# Altium PCB pcb_sst.PcbDoc
Units mm, origin at the board's own origin, x right, y up, seen from the top; angles counter-clockwise.
Board outline 129 x 99 mm, 2 copper layers (Top Layer, Bottom Layer); 47 components, 39 nets, 191 pads, 25 vias.
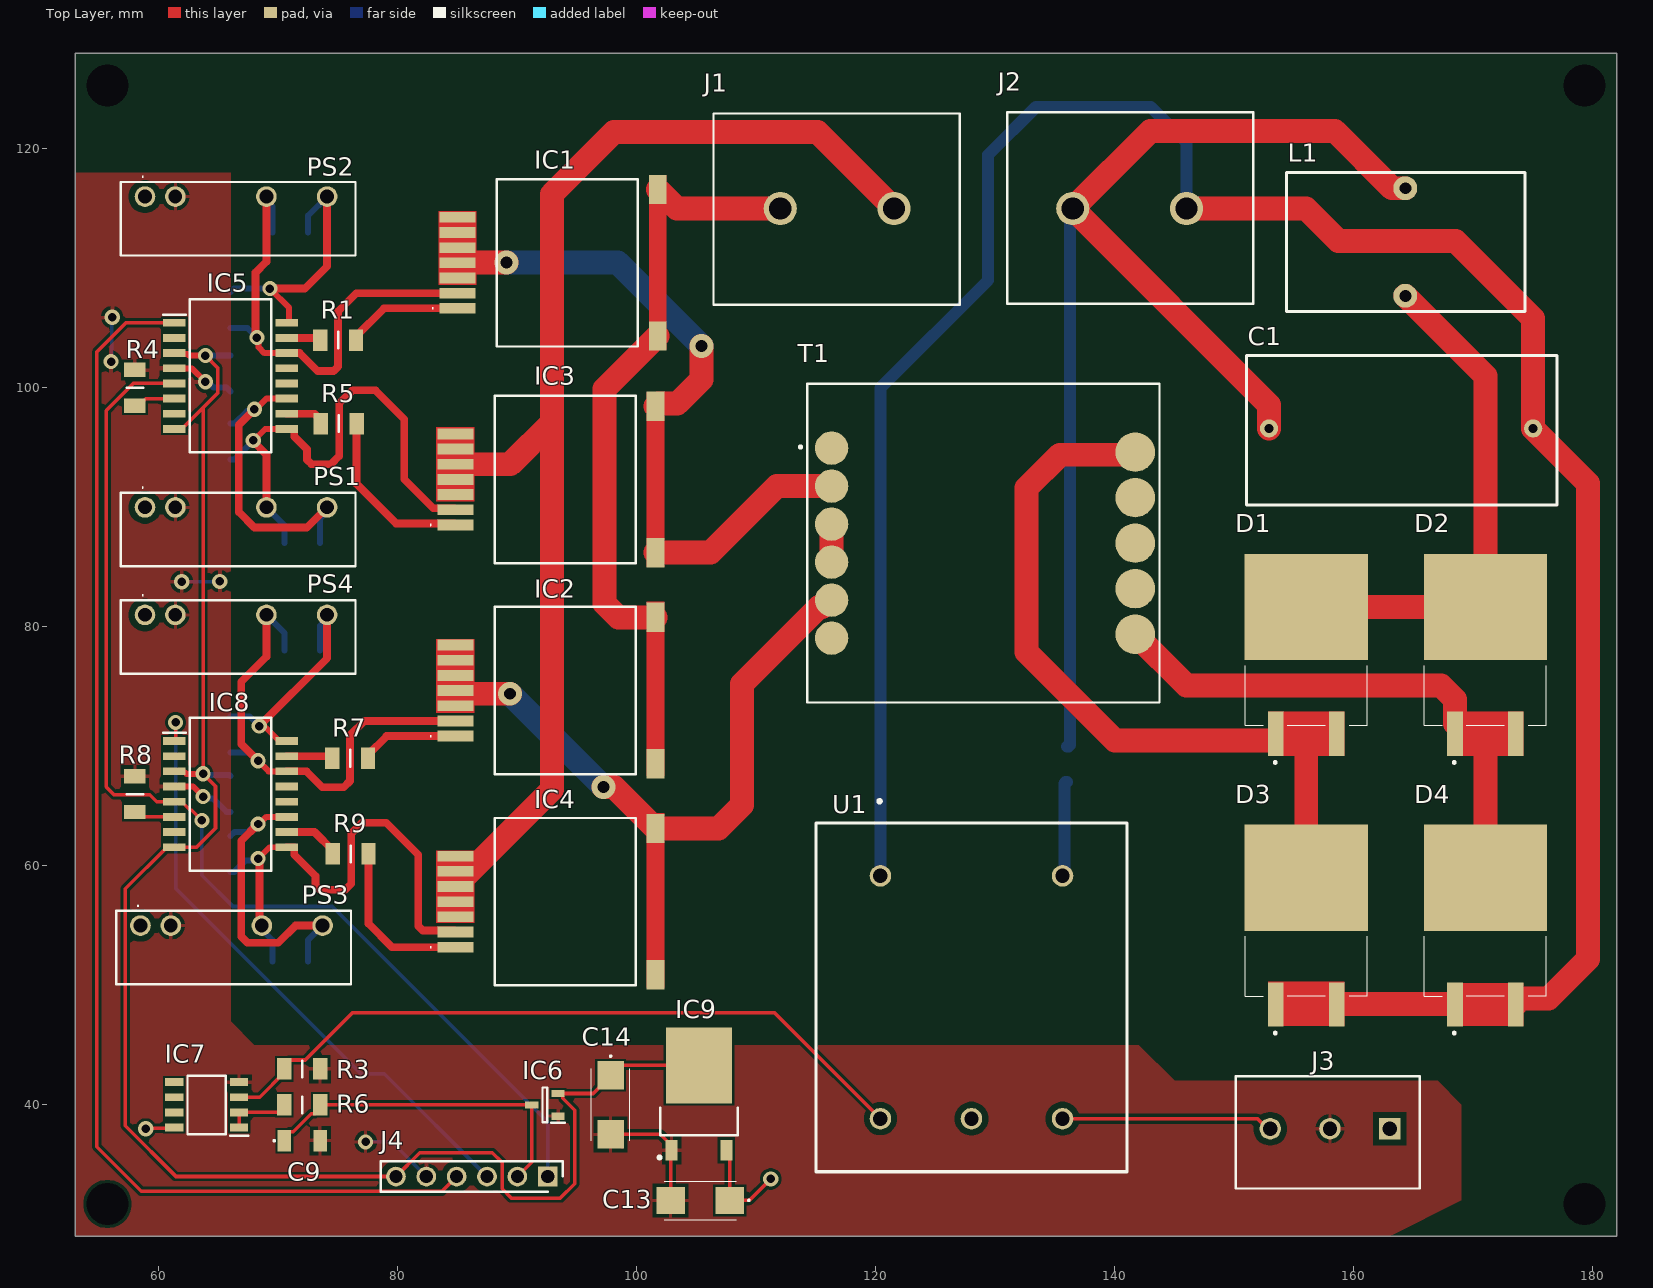
[diagram p0: Top Layer view]
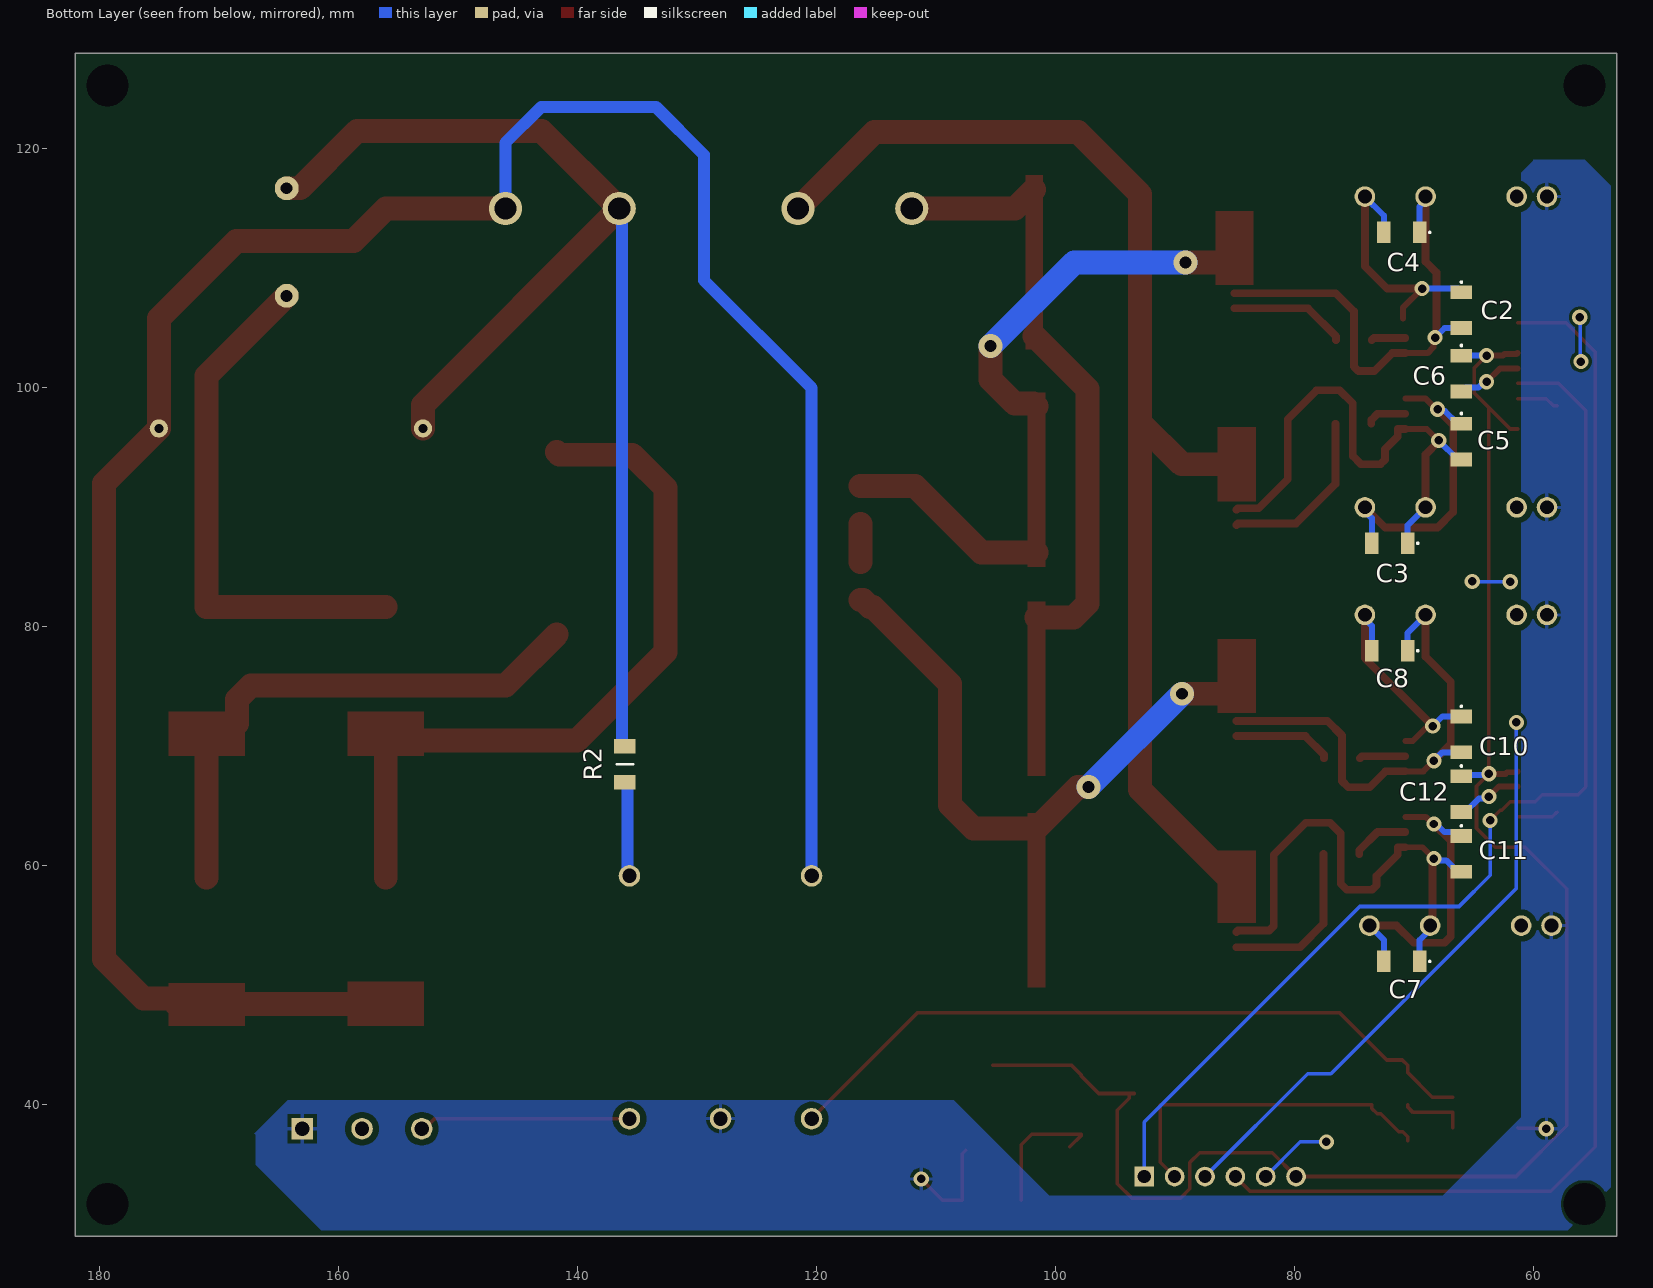
[diagram p1: Bottom Layer view, seen from below]
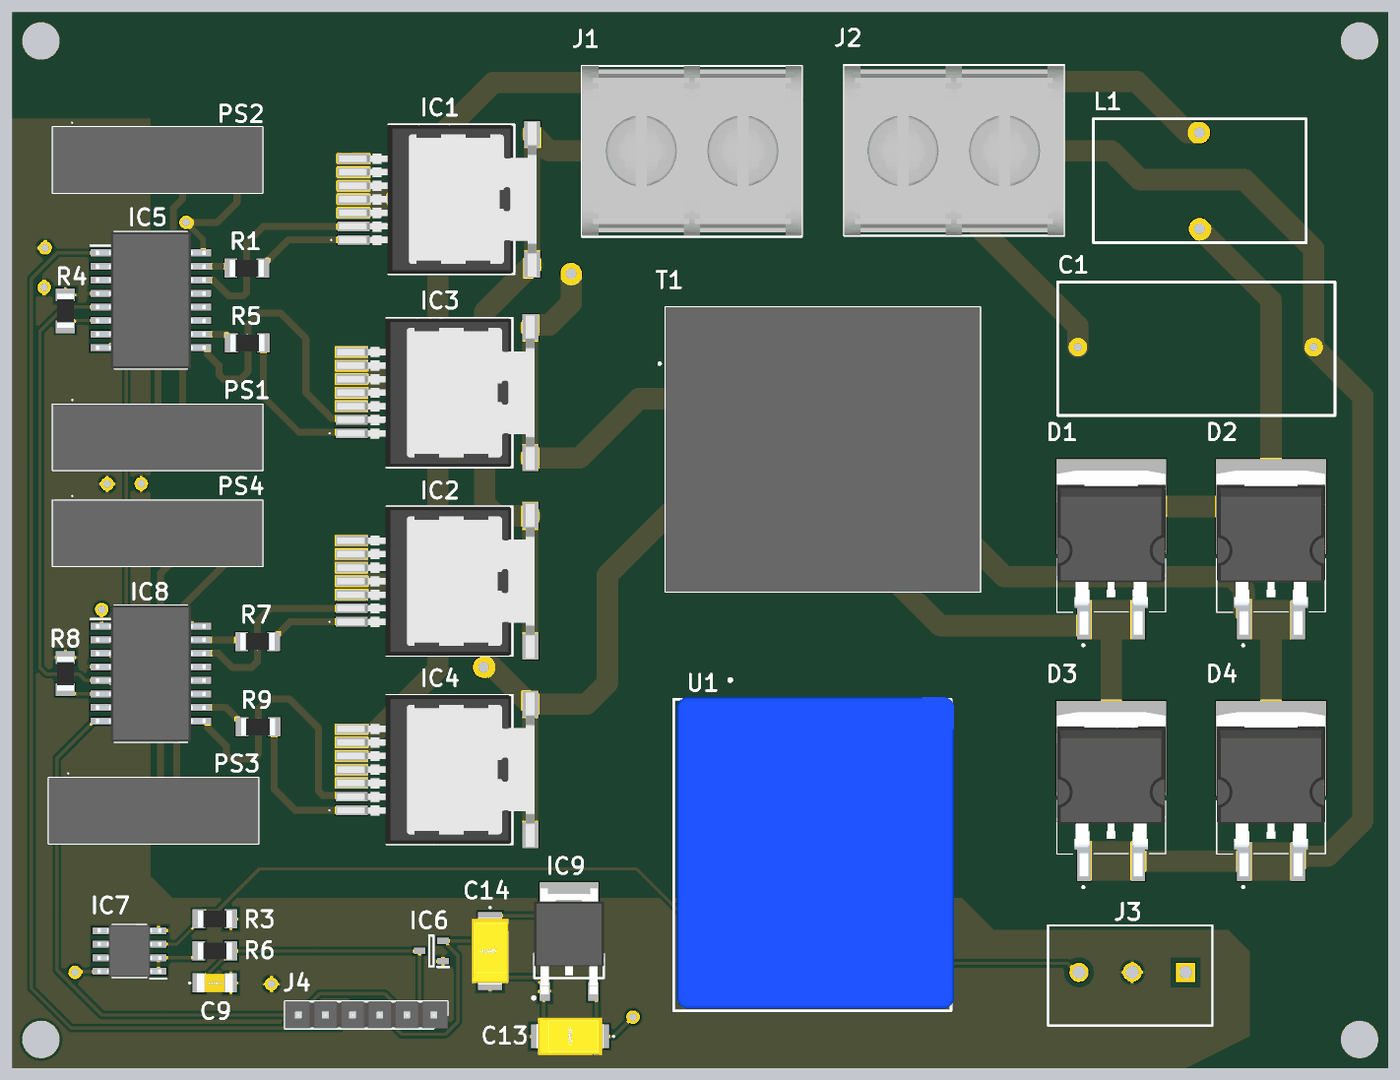
[diagram p2: 3D render of the assembled board from above, using the file's embedded part models]
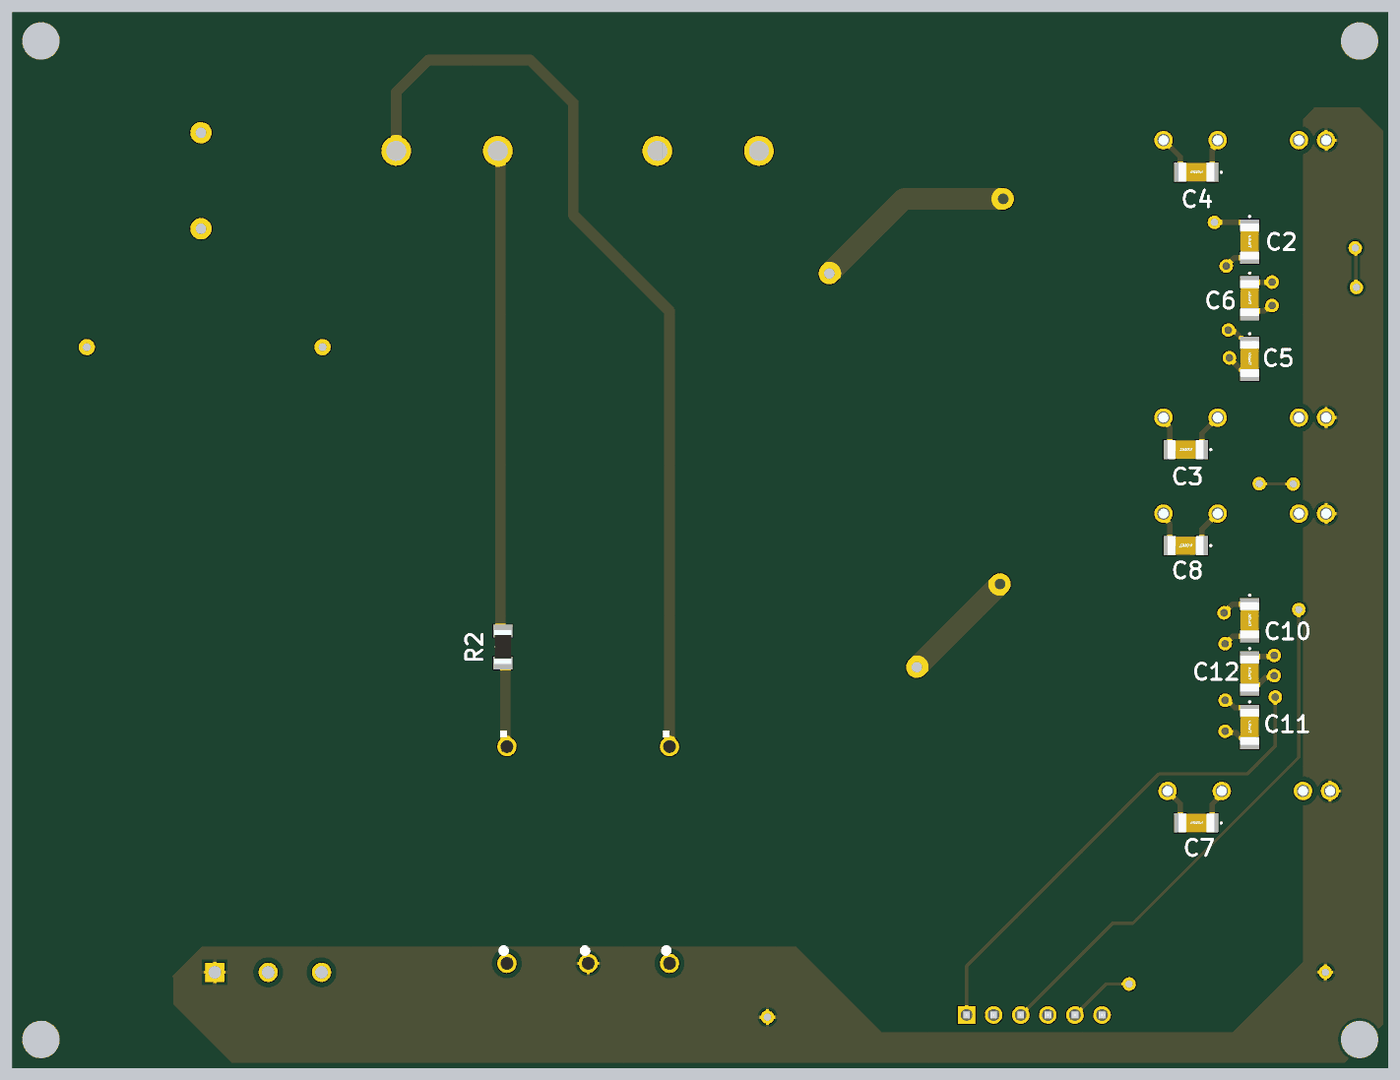
[diagram p3: 3D render of the assembled board from below, using the file's embedded part models]

## Layer stack, top to bottom
Top Solder: solder mask 0.0102, Solder Resist, Dk 3.5
Top Layer: signal copper 0.0356
Dielectric 1: dielectric 0.32, FR-4, Dk 4.8
Bottom Layer: signal copper 0.0356
Bottom Solder: solder mask 0.0102, Solder Resist, Dk 3.5

## Board outline
53,128 53,29 182,29 182,128

## Design rules (kind name [scope] priority, off if disabled: settings)
Clearance Clearance_1 [OnMid vs OnMid] p1: gap=0.254 ignorepadtopadclearanceinfootprint=FALSE except(0.127: Arc-Arc Arc-Track Arc-Text Track-Track Track-Text SMDPad-SMDPad Text-Text; 0.2: Arc-SMDPad Track-SMDPad SMDPad-THPad SMDPad-Fill SMDPad-Poly SMDPad-Region SMDPad-Text; 0.5: THPad-THPad THPad-Fill THPad-Poly THPad-Region Fill-Fill Fill-Poly Fill-Region Poly-Poly Poly-Region Region-Region; 0.8: Hole-Hole) sourcerule=36 cellrowname=All cellrowtype=0 cellcolname=All cellcoltype=0 innerlayers=TRUE
Clearance Clearance_2 [(ExistsOnLayer('Top Layer') Or ExistsOnLayer('Bottom Layer')) vs (ExistsOnLayer('Top Layer') Or ExistsOnLayer('Bottom Layer'))] p2: gap=0.254 ignorepadtopadclearanceinfootprint=FALSE except(0.127: Arc-Arc Arc-Track Arc-Text Track-Track Track-Text SMDPad-SMDPad Text-Text; 0.2: Arc-SMDPad Track-SMDPad SMDPad-THPad SMDPad-Fill SMDPad-Poly SMDPad-Region SMDPad-Text; 0.5: THPad-THPad THPad-Fill THPad-Poly THPad-Region Fill-Fill Fill-Poly Fill-Region Poly-Poly Poly-Region Region-Region; 0.8: Hole-Hole) sourcerule=36 cellrowname=All cellrowtype=0 cellcolname=All cellcoltype=0 outerlayers=TRUE
Clearance [All] p3: gap=0.254 ignorepadtopadclearanceinfootprint=FALSE ismatrix=TRUE
HoleSize [All] p1: absolutevalues=TRUE maxlimit=3.5 minlimit=0.025 maxpercent=80.000 minpercent=20.000
MinimumSolderMaskSliver [All] p1: minsoldermaskwidth=0.16
PolygonConnect [All] p1: connectstyle=Relief reliefconductorwidth=0.3 reliefentries=4 polygonreliefangle="90 Angle" airgapwidth=0.3
RoutingVias [All] p1: holewidth=1 width=2 viastyle="Through Hole" minholewidth=1 minwidth=2 maxholewidth=1 maxwidth=2
SilkToSolderMaskClearance [IsPad] p1: minsilkscreentomaskgap=0.12 clearancetoexposedcopper=TRUE
SolderMaskExpansion [All] p1: expansion=0.102 istentingtop=FALSE
Width [All] p1: maxlimit=2.5 minlimit=0.3 preferedwidth=0.3 minimp=50.000000 maximp=50.000000 favimp=50.000000
27 further rules are at their usual default settings.

## Components (designator, comment, footprint, x,y, rotation, side; value= is the part's Value field where it differs from the comment)
C1 "EEE-FK0J103SM" r60_mkt_10_100_capacitor_10uF 152.9,96.6 r0 top
C2 "1pF" C1206 66,106.5 r270 bottom
C3 "1uF" C1206 72,87 r0 bottom
C4 "1uF" C1206 71,113 r0 bottom
C5 "1pF" C1206 66,95.5 r270 bottom
C6 "100nF" C1206 66,101.19 r270 bottom
C7 "1uF" C1206 71,52 r0 bottom
C8 "1uF" C1206 72,78 r0 bottom
C9 "100nF" C1206 72,37 r0 top
C10 "1pF" C1206 66,71 r270 bottom
C11 "1pF" C1206 66,61 r270 bottom
C12 "100nF" C1206 66,66 r270 bottom
C13 "10uF" T491C 105.3,32 r180 top
C14 "10uF" T491C 97.8,40 r270 top
D1 "STPS41L30CG-TR" STPS41L30CGTR 156.014,76.357 r0 top
D2 "STPS41L30CG-TR" STPS41L30CGTR 171,76.357 r0 top
D3 "STPS41L30CG-TR" STPS41L30CGTR 156.014,53.7 r0 top
D4 "STPS41L30CG-TR" STPS41L30CGTR 171,53.7 r0 top
IC1 "SCT055HU65G3AG" SCT055HU65G3AG 94.18,110.46 r270 top
IC2 "SCT055HU65G3AG" SCT055HU65G3AG 94,74.667 r270 top
IC3 "SCT055HU65G3AG" SCT055HU65G3AG 94,92.333 r270 top
IC4 "SCT055HU65G3AG" SCT055HU65G3AG 94,57 r270 top
IC5 "ADUM4221-1ARIZ" SOIC127P1030X264-16N 66,101 r0 top
IC6 "bat54s" BAT54S 92.3,40 r180 top
IC7 "TSX712IDT" SO-8 64,40 r180 top
IC8 "ADUM4221-1ARIZ" SOIC127P1030X264-16N 66,66 r0 top
IC9 "LM1117IDT-3.3" TO228P991X238-3N 105.2,40.9 r90 top
J1 "NC6-P108-02" NC6P10802 112,115 r0 top
J2 "NC6-P108-02" NC6P10802 146,115 r180 top
J3 "Conector 1x3P" "Conector 1x3 Screw" 163,38 r180 top
J4 "M20-9990646" HDRV6W64P0X254_1X6_1524X254X864P 92.54,34 r180 top
L1 "Inductor" bobine_handmade_20mm_diam 164.3,112.2 r180 top value=1u
PS1 "MEV1S1515SC" MEV1S1515SC 58.84,90 r0 top
PS2 "MEV1S1515SC" MEV1S1515SC 58.84,116 r0 top
PS3 "MEV1S1515SC" MEV1S1515SC 58.46,55 r0 top
PS4 "MEV1S1515SC" MEV1S1515SC 58.84,81 r0 top
R1 "10" RESC3216X75N 75,104 r0 top
R2 "5k" RESC3216X75N 136,68.5 r270 bottom
R3 "120" RESC3216X75N 72,43 r0 top
R4 "10k" RESC3216X75N 58,100 r270 top
R5 "10" RESC3216X75N 75.05,97 r0 top
R6 "10k" RESC3216X75N 72,40 r0 top
R7 "1k" RESC3216X75N 76,69 r0 top
R8 "10k" RESC3216X75N 58,66 r270 top
R9 "1k" RESC3216X75N 76.05,61 r0 top
T1 "PL300-100L" PL300100L 129,87 r0 top
U1 "LV25P" LV-25-P/LV-20-P 128,49 r270 top

## Footprints (in the part's own frame and the unit in brackets; to place one, negate y for a bottom-side part, rotate by r counter-clockwise, add the part's x,y. Pads: shape width x height; smd on the part's side, far side on the other; paste and mask are expansions set on the pad)
BAT54S [mm]
  rect 1.1x0.6 smd: 1(-1.1,0.95) 2(-1.1,-0.95) 3(1.1,0)
  silkscreen extent -1.65,-1.45 0.2,1.5
bobine_handmade_20mm_diam [mm]
  round 2 hole 1: 1(0,4.5) 2(0,-4.5)
  silkscreen extent -10,-5.8 9.95,5.8
C1206 [mm]
  rect 1.15x1.8 smd: 1(-1.5,0) 2(1.5,0)
  silkscreen extent -2.4,-0.05 -2.3,0.05, body extent -1.7,-0.9 1.7,0.9, height 1.1
"Conector 1x3 Screw" [mm]
  rect 1.8x1.8 hole 1.2: 1(0,0)
  round 1.8 hole 1.2: 2(5,0) 3(10,0)
  silkscreen extent -2.5,-4.4 12.9,5
HDRV6W64P0X254_1X6_1524X254X864P [mm]
  rect 1.65x1.65 hole 1.1: 1(0,0)
  round 1.65 hole 1.1: 2(2.54,0) 3(5.08,0) 4(7.62,0) 5(10.16,0) 6(12.7,0)
  silkscreen extent -1.27,-1.27 13.97,1.27, body extent -1.27,-1.27 13.97,1.27, height 8.64
LV-25-P/LV-20-P [mm]
  round 1.8 hole 1.2: 1(-10.16,-7.62) 2(10.16,-7.62) 3(10.16,0) 4(10.16,7.62) 5(-10.16,7.62)
  silkscreen extent -16.54,-13 14.6,13, body extent -14.8,-12.7 14.4,13.3, height 16.4
MEV1S1515SC [mm]
  round 1.725 hole 1.15: 1(0,0) 2(2.54,0) 5(10.16,0) 7(15.24,0)
  silkscreen extent -2.03,-4.92 17.62,1.7, body extent -2.03,-4.92 17.62,1.22, height 10.25
NC6P10802 [mm]
  round 2.781 hole 1.854: 1(0,0) 2(9.525,0)
  silkscreen extent -5.59,-8.05 15.01,7.95, body extent -5.58,-7.94 15.02,7.94, height 16.2
PL300100L [mm]
  round 2.79 smd: 1(-12.7,7.95) 2(-12.7,4.77) 3(-12.7,1.59) 4(-12.7,-1.59) 5(-12.7,-4.77) 6(-12.7,-7.95)
  round 3.3 smd: 7(12.7,-7.62) 8(12.7,-3.81) 9(12.7,0) 10(12.7,3.81) 11(12.7,7.62)
  silkscreen extent -15.41,-13.33 14.73,13.33, body extent -14.73,-13.33 14.73,13.33, height 10.5
r60_mkt_10_100_capacitor_10uF [mil]
  round 60 hole 30: 1(0,0) 2(870.08,0)
  silkscreen extent -75,-252 949,240
RESC3216X75N [mm]
  rect 1.2x1.8 smd: 1(-1.5,0) 2(1.5,0)
  silkscreen extent 0,-0.7 0,0.7, body extent -1.6,-0.8 1.6,0.8, height 0.75
SCT055HU65G3AG [mm]
  rect 0.9x3 smd: 1(3.81,-9.18) 2(2.54,-9.18) 3(1.27,-9.18) 4(0,-9.18) 5(-1.27,-9.18) 6(-2.54,-9.18) 7(-3.81,-9.18)
  rect 2.45x1.5 smd: 8(-6.125,7.57) 9(6.125,7.57)
  silkscreen extent -7,-11.3 7,5.9, body extent -7.23,-10.54 7.23,7.96, height 3.55
SO-8 [mm]
  rect 1.525x0.65 smd: 1(-2.712,1.905) 2(-2.712,0.635) 3(-2.712,-0.635) 4(-2.712,-1.905) 5(2.712,-1.905) 6(2.712,-0.635) 7(2.712,0.635) 8(2.712,1.905)
  silkscreen extent -3.47,-2.45 1.6,2.58, body extent -3,-2.45 3,2.45, height 1.75
SOIC127P1030X264-16N [mm]
  rect 1.9x0.65 smd: 1(-4.7,4.445) 2(-4.7,3.175) 3(-4.7,1.905) 4(-4.7,0.635) 5(-4.7,-0.635) 6(-4.7,-1.905) 7(-4.7,-3.175) 8(-4.7,-4.445) 9(4.7,-4.445) 10(4.7,-3.175) 11(4.7,-1.905) 12(4.7,-0.635) 13(4.7,0.635) 14(4.7,1.905) 15(4.7,3.175) 16(4.7,4.445)
  silkscreen extent -5.65,-6.4 3.4,6.4, body extent -5.15,-6.4 5.15,6.4, height 2.64
STPS41L30CGTR [mm]
  rect 1.3x3.7 smd: 1(-2.54,-5.3) 3(2.54,-5.3)
  rect 10.3x8.9 smd: 2(0,5.3)
  silkscreen extent -5.1,-7.8 5.1,0.4, body extent -5.1,-6.74 5.1,8.68, height 4.83
T491C [mm]
  rect 2.37x2.23 smd: 1(-2.47,0) 2(2.47,0)
  silkscreen extent -4.12,-1.6 3,1.6, body extent -3.15,-1.75 3.15,1.75, height 2.81
TO228P991X238-3N [mm]
  rect 1.75x1 smd: 1(-4.7,2.285) 3(-4.7,-2.285)
  rect 6.35x5.55 smd: 4(2.4,0)
  silkscreen extent -5.42,-3.25 -1.15,3.42, body extent -4.95,-3.29 4.95,3.29, height 2.47

## Part data
C1: "Capacitor Polarised", Manufacturer_Name=Panasonic, Mouser Part Number=667-EEE-FK0J103SM, Arrow Part Number=EEE-FK0J103SM, Arrow Price/Stock=https://www.arrow.com/en/products/eee-fk0j103sm/panasonic?region=nac, Datasheet Link=http://industrial.panasonic.com/cdbs/www-data/pdf/RDE0000/ABA0000C1247.pdf, Height=17mm, Manufacturer_Part_Number=EEE-FK0J103SM, Mouser Price/Stock=https://www.mouser.co.uk/ProductDetail/Panasonic/EEE-FK0J103SM?qs=BZBei1rCqCBAIuPdads%2FBA%3D%3D
C2 C3 C4 C5 C6 C7 C8 C9 C10 C11 C12: library part Capacitor
C13: library part Capacitor, "tantalum"
C14: library part Capacitor, "Tantalum"
D1 D2 D3 D4: "Schottky Diode", Manufacturer_Name=STMicroelectronics, Mouser Part Number=511-STPS41L30CG-TR, Arrow Part Number=STPS41L30CG-TR, Arrow Price/Stock=https://www.arrow.com/en/products/stps41l30cg-tr/stmicroelectronics?region=nac, Datasheet Link=https://componentsearchengine.com/Datasheets/2/STPS41L30CG-TR.pdf, Height=4.6mm, Manufacturer_Part_Number=STPS41L30CG-TR, Mouser Price/Stock=https://www.mouser.co.uk/ProductDetail/STMicroelectronics/STPS41L30CG-TR?qs=jc1eLQFRxDHV9yBTVSfaIA%3D%3D
IC1 IC2 IC3 IC4: "Integrated Circuit", Manufacturer_Name=STMicroelectronics, Mouser Part Number=511-SCT055HU65G3AG, Datasheet Link=https://www.st.com/resource/en/datasheet/sct055hu65g3ag.pdf, Manufacturer_Part_Number=SCT055HU65G3AG, Mouser Price/Stock=https://www.mouser.co.uk/ProductDetail/STMicroelectronics/SCT055HU65G3AG?qs=amGC7iS6iy%252BmvA31UWzWZg%3D%3D
IC5 IC8: "Integrated Circuit", Manufacturer_Name="Analog Devices", Mouser Part Number=584-ADUM4221-1ARIZ, Arrow Part Number=ADUM4221-1ARIZ, Arrow Price/Stock=https://www.arrow.com/en/products/adum4221-1ariz/analog-devices?region=nac, Datasheet Link=https://www.mouser.com/datasheet/2/609/adum4221_adum4221_1-1901725.pdf, Height=2.64mm, Manufacturer_Part_Number=ADUM4221-1ARIZ, Mouser Price/Stock=https://www.mouser.co.uk/ProductDetail/Analog-Devices/ADUM4221-1ARIZ?qs=DPoM0jnrROU7HCm%2F%252BdCvpQ%3D%3D
IC9: "Integrated Circuit", Manufacturer_Name="Texas Instruments", Mouser Part Number=926-LM1117IDT-33, Datasheet Link=https://datasheet.datasheetarchive.com/originals/distributors/SFDatasheet-3/sf-00077938.pdf, Height=2.38mm, Manufacturer_Part_Number=LM1117IDT-3.3, Mouser Price/Stock=https://www.mouser.co.uk/ProductDetail/Texas-Instruments/LM1117IDT-33?qs=X1J7HmVL2ZH2wA5IJrsANw%3D%3D
J1 J2: "Connector", Manufacturer_Name="TE Connectivity", Mouser Part Number=571-314376640, Arrow Part Number=NC6-P108-02, Arrow Price/Stock=https://www.arrow.com/en/products/nc6-p108-02/te-connectivity?region=nac, Datasheet Link=https://www.te.com/commerce/DocumentDelivery/DDEController?Action=srchrtrv&DocNm=1-1773458-2_BARRIER_STRIPS_QRG&DocType=Data%20Sheet&DocLang=English&PartCntxt=3-1437664-0&DocFormat=pdf, Height=16.764mm, Manufacturer_Part_Number=NC6-P108-02, Mouser Price/Stock=https://www.mouser.co.uk/ProductDetail/TE-Connectivity/NC6-P108-02?qs=eaV0Ah4wSgl6VCGwzfbTcQ%3D%3D
J4: "Connector", Manufacturer_Name=Harwin, Mouser Part Number=855-M20-9990646, Datasheet Link=https://cdn.harwin.com/pdfs/M20-999.pdf, Height=8.64mm, Manufacturer_Part_Number=M20-9990646, Mouser Price/Stock=https://www.mouser.co.uk/ProductDetail/Harwin/M20-9990646?qs=Jph8NoUxIfXDcWZbabSSiw%3D%3D
PS1 PS2 PS3 PS4: "Power Supply", Manufacturer_Name="Murata Electronics", Mouser Part Number=580-MEV1S1515SC, Arrow Part Number=MEV1S1515SC, Arrow Price/Stock=https://www.arrow.com/en/products/mev1s1515sc/murata-power-solutions?region=nac, Datasheet Link=https://power.murata.com/data/power/ncl/kdc_mev.pdf, Height=10.15mm, Manufacturer_Part_Number=MEV1S1515SC, Mouser Price/Stock=https://www.mouser.co.uk/ProductDetail/Murata-Power-Solutions/MEV1S1515SC?qs=ElE%2F8fqQeYgmd421%2FET8wA%3D%3D
R1 R4 R5 R6 R7 R8 R9: library part Resistor
R2: library part Resistor, "140 mW"
R3: library part Resistor, "82.5 mW"
T1: "Transformer", Manufacturer_Name=COILCRAFT, Mouser Part Number=994-PL300-100L, Datasheet Link=https://componentsearchengine.com/Datasheets/2/PL300-100L.pdf, Height=10.4mm, Manufacturer_Part_Number=PL300-100L, Mouser Price/Stock=https://www.mouser.co.uk/ProductDetail/Coilcraft/PL300-100L?qs=W38ilblRkRl%252BXAXYuhUadw%3D%3D
U1: "Undefined or Miscellaneous", Manufacturer_Name=LEM, Manufacturer_Part_Number=LV25P
L1: SimulationGenericComponent=True

## Free pads (board coordinates)
  round 0 hole 3.5 mask+0: ""(55.7,31.7) ""(55.7,125.3) ""(179.3,31.7) ""(179.3,125.3)

## Via types
v1: diameter 1.27, hole 0.711, Top Layer to Bottom Layer, 21 vias
v2: diameter 2, hole 1, Top Layer to Bottom Layer, 4 vias

## Nets (pads, with @x,y where several pads share a name; then routed paths per layer and width w, separated by ;. In a path a pad name is that pad's centre, name@x,y a point inside that pad or via, vN(x,y) a via of type N, cw(c..) or ccw(c..) an arc to the next point about the centre after c; other vN are vias at no path point)
+3.3V: C6.1 C12.1 C14.1 IC5.3 IC5.8 IC6.2 IC8.3 IC8.8 IC9.4 J4.6 | length 147.6
  Top Layer w0.3: IC5.8 61.925,96.555 63.7,98.33 ; v1(63.9,102.7) 64.939,101.661 64.939,99.569 63.7,98.33 ; IC6.2 IC6.2@93.65,40.95 ; IC9.4 98.63,43.3 C14.1 97.8,42.4 96.35,40.95 IC6.2@93.65,40.95 ; 63.7,98.33 v1(63.7,67.7) 64.739,66.661 64.739,63.139 63.155,61.555 IC8.8 60.675,61.555 57.194,58.074 57.194,38.237 61.431,34 J4.6 81.84,36 87.9,36 88.73,35.17 88.73,32.97 89.5,32.2 93.6,32.2 94.8,33.4 94.8,39.55 93.8,40.55 93.8,40.8 IC6.2@93.65,40.95
  Top Layer w0.5: IC8.3 61.375,67.83 62.185,67.83 62.315,67.7 v1(63.7,67.7) ; IC5.3 61.375,102.83 62.385,102.83 62.515,102.7 v1(63.9,102.7)
  Bottom Layer w0.5: v1(63.7,67.7) 63.8,67.6 65.9,67.6 C12.1 ; v1(63.9,102.7) 63.905,102.695 65.995,102.695 C6.1
+15v: C13.1 IC7.8 IC9.3 J3.1 PS1.1 PS2.1 PS3.1 PS4.1 U1.3 | length 11.3
  Top Layer w0.3: v1(58.9,38) 58.947,38.048 61.24,38.048 IC7.8 ; IC9.3 107.77,35.915 C13.1 109.4,32 v1(111.2,33.8) 111,33.8 v1@110.9,33.9
+15V_P1: C3.2 C5.1 IC5.11 PS1.7 | length 26.6
  Top Layer w0.5: v1(68,98.2) 68.105,98.2 69,99.095 IC5.11
  Top Layer w0.65: v1(68,98.2) 66.686,96.886 66.686,89.614 68,88.3 72.38,88.3 PS1.7
  Bottom Layer w0.5: C5.1 66.325,97 67.378,98.053 67.853,98.053 v1(68,98.2) ; C3.2 73.5,89.089 74.08,89.669 PS1.7
+15V_P2: C2.1 C4.2 IC5.16 PS2.7 | length 21.6
  Top Layer w0.5: v1(69.3,108.3) 70.9,106.7 70.9,105.8
  Top Layer w0.65: v1(69.3,108.3) 72.2,108.3 74.08,110.18 PS2.7
  Bottom Layer w0.5: C2.1 66.3,108.3 v1(69.3,108.3) ; C4.2 72.5,114.42 PS2.7
+15V_P3: C7.2 C11.1 IC8.11 PS3.7 | length 26.5
  Top Layer w0.5: v1(68.3,63.5) 68.405,63.5 69,64.095 IC8.11
  Top Layer w0.65: v1(68.3,63.5) 66.9,62.1 66.9,54.081 67.422,53.558 69.995,53.558 71.437,55 PS3.7
  Bottom Layer w0.5: C11.1 66.325,62.825 67.417,62.825 68.092,63.5 v1(68.3,63.5) ; C7.2 72.5,53.8 PS3.7
+15V_P4: C8.2 C10.1 IC8.16 PS4.7 | length 20.4
  Top Layer w0.5: v1(68.4,71.7) 68.547,71.553 68.967,71.553 70.075,70.445 IC8.16
  Top Layer w0.65: v1(68.4,71.7) 74.08,77.38 PS4.7
  Bottom Layer w0.5: C10.1 67.6,72.5 v1(68.4,71.7) ; C8.2 73.5,80.089 74.08,80.669 PS4.7
-15v: J3.3 U1.4 | length 17.7
  Top Layer w0.3: U1.4 151.931,38.84 152.771,38 J3.3
DIS: IC5.5 IC8.5 J4.1 | length 93.9
  Top Layer w0.3: IC5.5 57.87,100.365 55.6,98.095 55.6,66.6 56.25,65.95 59.25,65.95 59.835,65.365 IC8.5 61.925,65.365 62.637,64.653 62.747,64.653 v1(63.6,63.8)
  Bottom Layer w0.3: v1(63.6,63.8) 63.6,59.2 66.2,56.6 74.5,56.6 92.54,38.56 J4.1
gate_aB: IC3.1 R5.2 | length 14.7
  Top Layer w0.65: R5.2 76.55,91.95 79.852,88.648 84.695,88.648 IC3.1
gate_aT: IC1.1 R1.2 | length 9.8
  Top Layer w0.65: R1.2 76.5,104.3 78.85,106.65 IC1.1
gate_bB: IC4.1 R9.2 | length 13.9
  Top Layer w0.65: R9.2 77.55,55.15 79.51,53.19 IC4.1
gate_bT: IC2.1 R7.2 | length 8.3
  Top Layer w0.65: R7.2 77.5,69.3 79.057,70.857 IC2.1
GND: C6.2 C9.2 C12.2 C13.2 C14.2 IC5.4 IC6.1 IC7.4 IC8.4 IC9.1 J3.2 J4.5 PS1.2 PS2.2 PS3.2 PS4.2 R3.2 R4.1 R8.1 | length 35.9
  Top Layer w0.3: C14.2@98.765,36.495 97.8,37.46 C14.2 101.96,37.53 102.83,36.66 C13.2
  Top Layer w0.5: IC8.4 62.865,66.635 v1(63.7,65.8) ; IC5.4 62.765,101.635 v1(63.9,100.5)
  Bottom Layer w0.3: v1(56,102.2) 56.05,102.25 56.05,105.85 v1(56.1,105.9) ; v1(61.915,83.768) 61.931,83.784 65.084,83.784 v1(65.1,83.8) ; v1(77.3,36.9) 79.48,36.9 J4.5
  Bottom Layer w0.5: v1(63.7,65.8) 63.847,65.653 64.522,65.653 65.675,64.5 C12.2 ; v1(63.9,100.5) 64.108,100.5 64.593,100.015 65.675,100.015 C6.2 66,99.7 C6.2@65.9,99.8
gnd_aB: C3.1 C5.2 IC3.2 IC5.9 PS1.5 | length 43.9
  Top Layer w0.5: v1(67.9,95.6) 67.949,95.6 68.904,96.555 IC5.9
  Top Layer w0.65: v1(67.9,95.6) 67.9,95.523 69,94.423 PS1.5 ; IC5.9 71.325,96.555 71.325,95.93 72.4,94.855 72.4,93.981 72.781,93.6 74.4,93.6 75.1,94.3 75.1,98.7 76.2,99.8 78.119,99.8 80.541,97.378 80.541,92.34 82.963,89.918 84.695,89.918 IC3.2
  Bottom Layer w0.5: C5.2 66.325,94 67.9,95.575 v1(67.9,95.6) ; PS1.5 70.5,88.5 C3.1
gnd_aT: C2.2 C4.1 IC1.2 IC5.14 PS2.5 | length 41.7
  Top Layer w0.5: v1(68.2,104.2) 68.347,104.053 68.347,103.393 68.835,102.905 IC5.14
  Top Layer w0.65: v1(68.2,104.2) 68.086,104.314 68.086,109.641 69,110.555 PS2.5 ; IC5.14 71.795,102.905 73.3,101.4 74.619,101.4 75,101.781 75,106.4 76.52,107.92 IC1.2
  Bottom Layer w0.5: C2.2 67.4,105 v1(68.2,104.2) ; PS2.5 69,115.669 69.5,115.169 C4.1
gnd_bB: C7.1 C11.2 IC4.2 IC8.9 PS3.5 | length 43.1
  Top Layer w0.5: v1(68.3,60.6) 69.255,61.555 IC8.9
  Top Layer w0.65: v1(68.3,60.6) 68.419,60.481 68.419,55.201 PS3.5 ; IC8.9 71.325,61.555 71.325,60.93 73.1,59.155 73.1,58.381 73.481,58 75.6,58 76.1,58.5 76.1,62.7 77,63.6 79.019,63.6 81.7,60.919 81.7,54.966 82.081,54.585 84.695,54.585 IC4.2
  Bottom Layer w0.5: C11.2 66.325,59.5 67.278,60.453 68.153,60.453 v1(68.3,60.6) ; PS3.5 68.62,54.669 69.5,53.789 C7.1
gnd_bT: C8.1 C10.2 IC2.2 IC8.14 PS4.5 | length 41.8
  Top Layer w0.5: v1(68.3,68.8) 69.195,67.905 IC8.14
  Top Layer w0.65: v1(68.3,68.8) 66.9,70.2 66.9,75.4 69,77.5 PS4.5 ; IC8.14 72.347,67.905 73.683,66.569 75.469,66.569 76,67.1 76,70.9 77.227,72.127 IC2.2
  Bottom Layer w0.5: C10.2 67.6,69.5 v1(68.3,68.8) ; PS4.5 70.5,79.5 C8.1
in+: IC1.8 IC1.9 IC2.8 IC2.9 J1.1 | length 39.9
  Top Layer w2: IC2.8 98.472,80.792 97.3,81.963 97.3,99.91 101.725,104.335 IC1.9 ; IC1.8 101.775,116.585 103.36,115 J1.1
in-: IC3.3 IC3.4 IC3.5 IC3.6 IC3.7 IC4.3 IC4.4 IC4.5 IC4.6 IC4.7 J1.2 | length 104.2
  Top Layer w2: IC4.5 84.82,58.32 92.9,66.4 92.9,97.1 ; IC3.5 89.403,93.603 92.9,97.1 ; J1.2 115.125,121.4 98.1,121.4 92.9,116.2 92.9,97.1
NetD1_1: D1.1 D1.3 D3.2 T1.11 | length 62.6
  Top Layer w2: T1.11 141.48,94.4 135.4,94.4 132.6,91.6 132.6,77.9 140,70.5 155.6,70.5 156,70.9 156.014,70.886 D3.2
NetD1_2: D1.2 D2.2 L1.1 | length 43.8
  Top Layer w2: D1.2 D2.2 171,101 L1.1
NetD2_1: D2.1 D2.3 D4.2 T1.7 | length 46.1
  Top Layer w2: T1.7 145.98,75.1 167.288,75.1 168.46,73.928 168.46,71.907 168.467,71.9 168.8,71.9 169.7,71 171,71 ; D4.2 171,71 ; 171.1,71.1 171,71
NetIC1_3: IC1.3 IC1.4 IC1.5 IC1.6 IC1.7 IC3.8 IC3.9 T1.2 | length 47.9
  Top Layer w2: IC1.4 85.04,110.5 v2(89.1,110.5) ; IC3.9 106.172,86.208 111.734,91.77 T1.2 ; IC3.8 101.795,98.683 103.383,98.683 105.4,100.7 v2(105.4,103.5)
  Bottom Layer w2: v2(89.1,110.5) 98.4,110.5 v2(105.4,103.5)
NetIC2_3: IC2.3 IC2.4 IC2.5 IC2.6 IC2.7 IC4.8 IC4.9 T1.5 | length 50.1
  Top Layer w2: IC2.4 85.087,74.4 v2(89.4,74.4) ; v2(97.2,66.6) 98.07,66.6 101.545,63.125 IC4.8 106.825,63.125 108.8,65.1 108.8,75.22 115.225,81.645 115.501,81.645 116.086,82.23 T1.5
  Bottom Layer w2: v2(89.4,74.4) v2(97.2,66.6)
NetIC5_6: IC5.6 R4.2 | length 3.5
  Top Layer w0.3: R4.2 58.3,98.5 58.895,99.095 IC5.6
NetIC5_10: IC5.10 R5.1 | length 3.4
  Top Layer w0.65: IC5.10 73.025,97.825 73.55,97.3 R5.1
NetIC5_15: IC5.15 R1.1 | length 2.9
  Top Layer w0.65: IC5.15 73.325,104.175 R1.1
NetIC7_1: IC7.1 IC7.2 R6.1 | length 5.4
  Top Layer w0.3: IC7.1 IC7.2 70.05,39.365 70.5,39.815 R6.1
NetIC7_3: IC7.3 R3.1 U1.2 | length 60.6
  Top Layer w0.3: IC7.3 68.435,40.635 70.5,42.7 R3.1 70.5,43.3 70.95,43.75 72.255,43.75 76.205,47.7 111.52,47.7 U1.2
NetIC8_6: IC8.6 R8.2 | length 3.5
  Top Layer w0.3: R8.2 58.405,64.095 IC8.6
NetIC8_10: IC8.10 R9.1 | length 4.8
  Top Layer w0.65: IC8.10 73.025,62.825 74.55,61.3 R9.1
NetIC8_15: IC8.15 R7.1 | length 3.9
  Top Layer w0.65: IC8.15 74.325,69.175 R7.1
NetR2_2: R2.2 U1.5 | length 8.1
  Bottom Layer w1: U1.5 135.62,59.38 135.6,59.4 135.644,59.4 135.773,59.53 135.773,66.9 135.873,67 R2.2
NetT1_3: T1.3 T1.4 | length 3.2
  Top Layer w2: T1.4 T1.3
out+: C1.1 J2.2 L1.2 R2.1 | length 103
  Top Layer w2: C1.1 152.9,98.575 J2.2 136.5,115 136.6,115.1 136.6,115.125 142.975,121.5 158.4,121.5 163.2,116.7 L1.2
  Bottom Layer w1: R2.1 136.138,70 136.237,70.1 136.237,114.763 J2.2
out-: C1.2 D3.1 D3.3 D4.1 D4.3 J2.1 U1.1 | length 202.4
  Top Layer w2: J2.1 156.006,115 158.706,112.3 168.5,112.3 175,105.8 C1.2 179.6,92 179.6,52.2 176.289,48.889 173.89,48.889 173.54,48.539 D4.3 ; 155.9,48.4 155.925,48.425 171.125,48.425 171.2,48.5 172.5,48.5 D4.3@172.97,48.97
  Bottom Layer w1: U1.1 120.38,99.98 129.4,109 129.4,119.5 133.4,123.5 143,123.5 146,120.5 J2.1
PWM_A: IC5.1 J4.4 | length 106.2
  Top Layer w0.3: IC5.1 57.245,105.445 54.8,103 54.8,36.5 58.529,32.771 83.691,32.771 J4.4
PWM_B: IC8.1 J4.3 | length 51.5
  Top Layer w0.3: IC8.1 61.4,70.545 v1(61.4,72)
  Bottom Layer w0.3: v1(61.4,72) 61.4,58.13 76.923,42.607 78.853,42.607 J4.3
v_adc: C9.1 IC6.3 J4.2 R6.2 | length 28.8
  Top Layer w0.3: C9.1 70.5,37.325 70.925,37.75 71.25,37.75 72.75,39.25 73.05,39.25 73.5,39.7 R6.2 IC6.3 91.2,35.2 J4.2
pads on no net: IC5.2 IC5.7 IC5.12 IC5.13 IC7.5 IC7.6 IC7.7 IC8.2 IC8.7 IC8.12 IC8.13 T1.1 T1.6 T1.8 T1.9 T1.10

## Polygon pours and split planes (outlines as drawn)
+15v on Bottom Layer "+15V_L02_P002" (solid, pour order 2): 55.7,119.1 60,119.1 60,119 61,118 61,38.962 67.562,32.4 100.5,32.4 108.5,40.4 164.2,40.4 167,37.6 166.9,37.5 166.9,35 161.4,29.5 57.1,29.5 53.5,33.1 53.5,116.9
GND on Top Layer "GND_L01_P000" (solid, pour order 0): 53,118 66,118 66,47 68,45 142,45 145,42 167,42 169,40 169,32 163,29 53,29

## Other copper
Top Layer:
  rectangle net out-: 167.8,46.6 174.2,50.2
  rectangle net out-: 152.8,46.6 159.2,50.3
  rectangle net NetD2_1: 167.8,69.2 174.2,72.9
  rectangle net NetD1_1: 152.8,69.2 159.2,72.9
  rectangle net NetIC2_3: 100.8,49.8 102.3,64.4
  rectangle net in+: 100.8,67.5 102.3,82.1
  rectangle net NetIC1_3: 100.8,85 102.3,99.6
  rectangle net in+: 101,103.2 102.5,117.8
  rectangle net in-: 83.2,55.2 86.4,61.3
  rectangle net NetIC2_3: 83.2,72.8 86.4,79
  rectangle net in-: 83.2,90.5 86.4,96.7
  rectangle net NetIC1_3: 83.4,108.6 86.6,114.8